# Altium PCB MC.PcbDoc
Units mm, origin at the board's own origin, x right, y up, seen from the top; angles counter-clockwise.
Board outline 74 x 102 mm, 2 copper layers (Top Layer, Bottom Layer); 24 components, 27 nets, 100 pads, 0 vias.
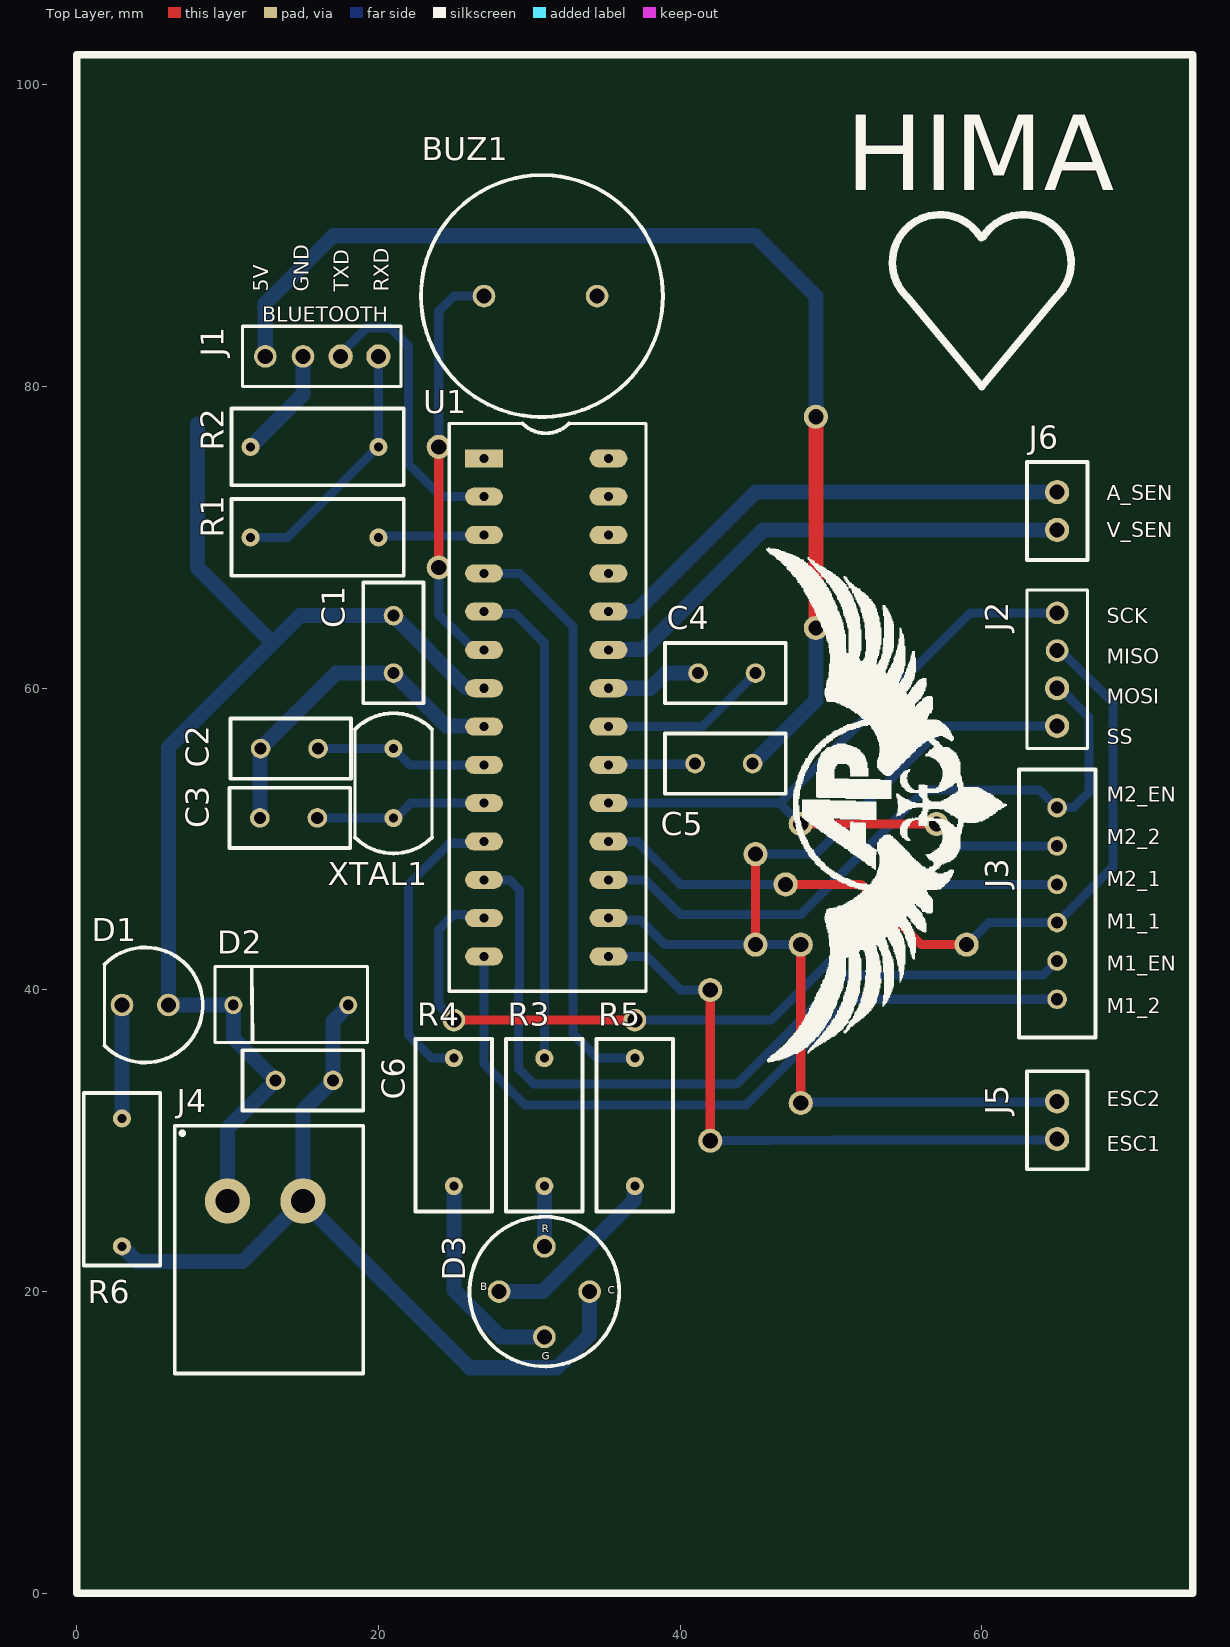
[diagram p0: Top Layer view]
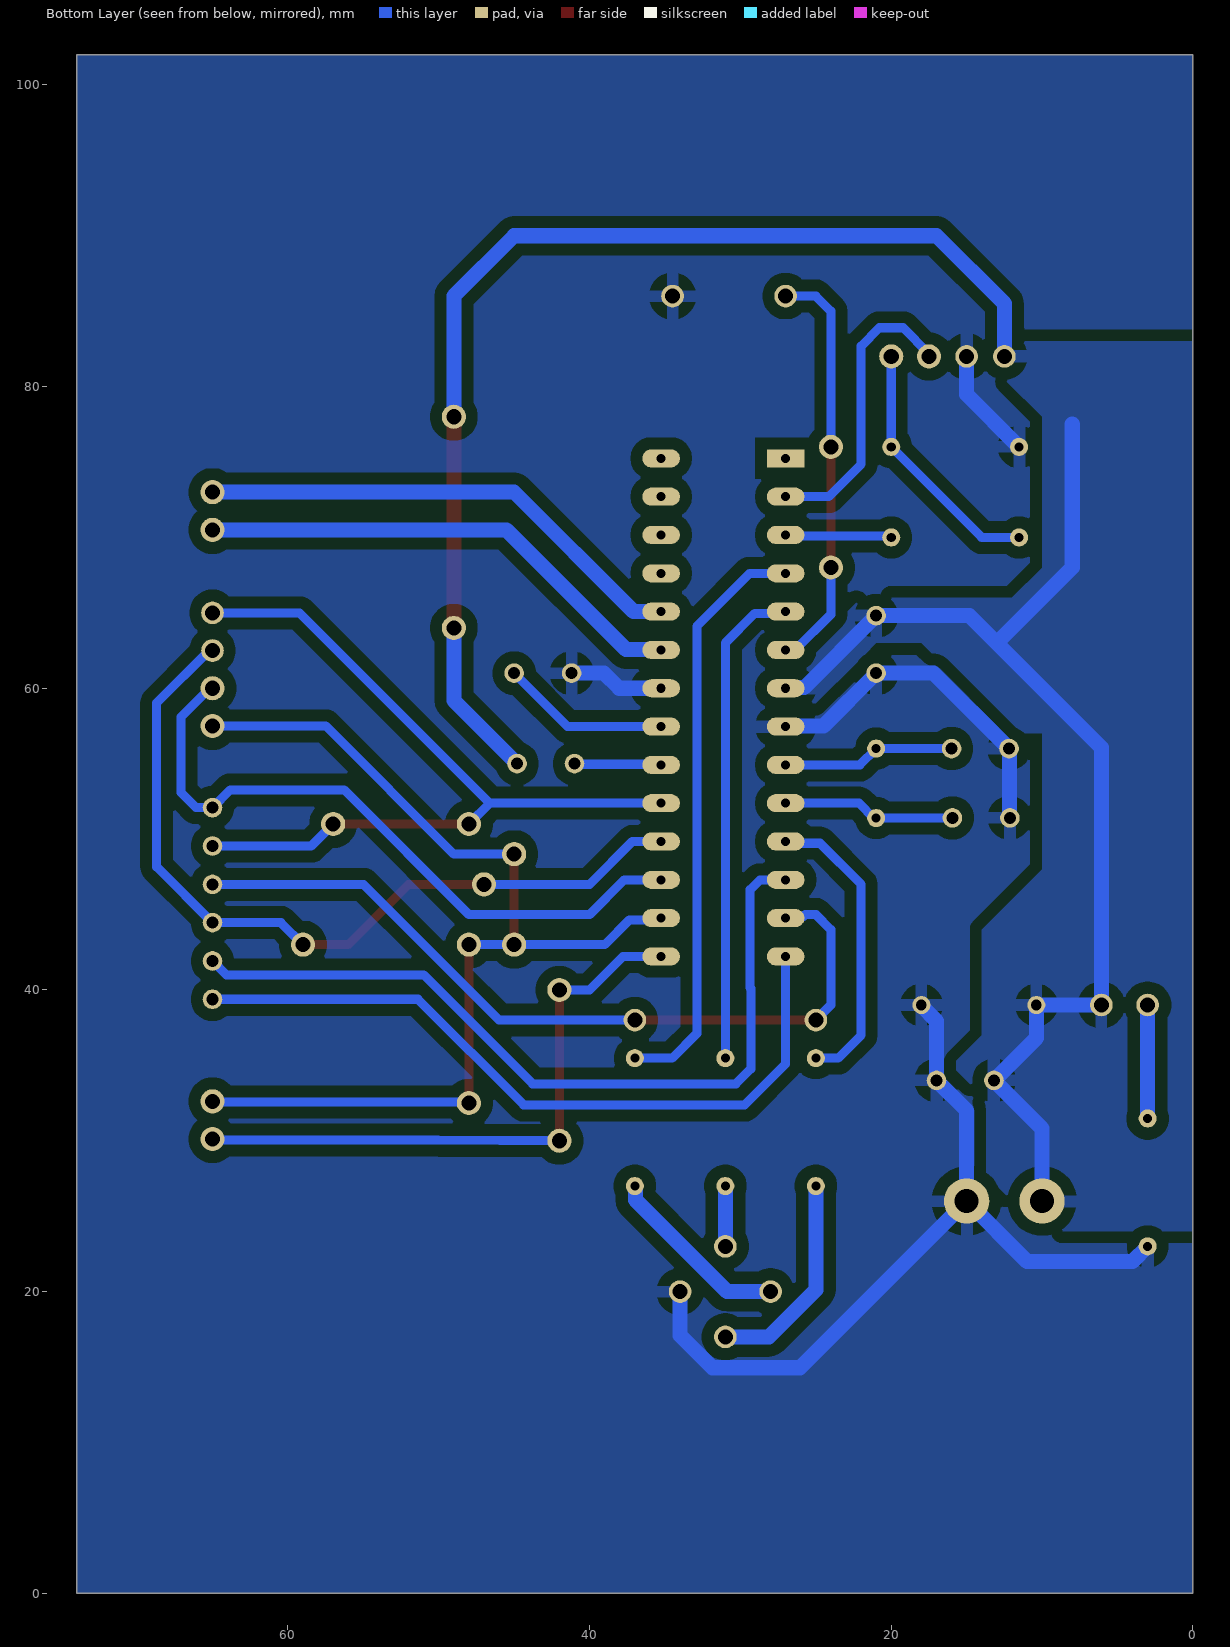
[diagram p1: Bottom Layer view, seen from below]

## Layer stack, top to bottom
Top Solder: solder mask 0.0102, Solder Resist, Dk 3.5
Top Layer: signal copper 0.0356
Dielectric 1: dielectric 0.32, FR-4, Dk 4.8
Bottom Layer: signal copper 0.0356
Bottom Solder: solder mask 0.0102, Solder Resist, Dk 3.5

## Board outline
0,0 74,0 74,102 0,102

## Design rules (kind name [scope] priority, off if disabled: settings)
Clearance [All] p1: gap=0.8 ignorepadtopadclearanceinfootprint=FALSE
PlaneClearance [All] p1: clearance=0.8
PlaneConnect [All] p1: planeconnectstyle=Relief reliefexpansion=0.8 reliefentries=4 reliefconductorwidth=0.8 reliefairgap=0.8
PolygonConnect [All] p1: connectstyle=Relief reliefconductorwidth=0.8 reliefentries=4 polygonreliefangle="90 Angle" airgapwidth=0.8
RoutingVias [All] p1: holewidth=0.711 width=1.27 viastyle="Through Hole" minholewidth=0.711 minwidth=1.27 maxholewidth=0.711 maxwidth=1.27
SolderMaskExpansion [All] p1: expansion=0.102 istentingtop=FALSE
Width [All] p1: maxlimit=1 minlimit=0.6 preferedwidth=0.8 minimp=50.000000 maximp=50.000000 favimp=50.000000
28 further rules are at their usual default settings.

## Components (designator, comment, footprint, x,y, rotation, side; value= is the part's Value field where it differs from the comment)
BUZ1 "BUZZER" Buzzer 27,86 r0 top
C1 "Ceramic Capacitor" "Ceramic Cap" 21,61 r90 top value=100nF
C2 "Ceramic Capacitor" "Ceramic Cap" 12.19,56 r0 top value=22pF
C3 "Ceramic Capacitor" "Ceramic Cap" 12.137,51.405 r0 top value=22pF
C4 "Ceramic Capacitor" "Ceramic Cap" 45,61 r180 top value=100nF
C5 "Ceramic Capacitor" "Ceramic Cap" 41,55 r0 top value=100nF
C6 "Ceramic Capacitor" "Ceramic Cap" 17,34 r180 top value=100nF
D1 "LED" LED5MM 6.072,39 r180 top
D2 "Zener" Zener10 18,39 r180 top value=5V
D3 "RGB" RGB 31,20 r0 top
J1 "Serial (Bluetooth)" Headers-4 20,82 r180 top
J2 "Communication-SPI" Headers-4 65,57.5 r90 top
J3 "Motors Control" "Headers 6-pins" 65,39.38 r90 top
J4 "Input VCC" "Terminal Block 2 Plugable" 10,26 r0 top
J5 "ESC Control" "Headers 2-Pins" 65,32.612 r270 top
J6 "Sensors" "Headers 2-Pins" 65,73 r270 top
R1 "Resistor" resistor 11.524,70 r0 top value=1K
R2 "Resistor" resistor 11.524,76 r0 top value=2K
R3 "Resistor" resistor 31,35.476 r270 top value=330
R4 "Resistor" resistor 25,35.476 r270 top value=330
R5 "Resistor" resistor 37,35.476 r270 top value=330
R6 "Resistor" resistor 3,23 r90 top value=330
U1 "ATmega328p" ATmega328PU 27,75.24 r0 top
XTAL1 "Crystal" Crystal 21,51.392 r90 top

## Footprints (in the part's own frame and the unit in brackets; to place one, negate y for a bottom-side part, rotate by r counter-clockwise, add the part's x,y. Pads: shape width x height; smd on the part's side, far side on the other; paste and mask are expansions set on the pad)
ATmega328PU [mm]
  rect 2.5x1.2 hole 0.6: 1(0,0)
  oval 2.5x1.2 hole 0.6: 2(0,-2.54) 3(0,-5.08) 4(0,-7.62) 5(0,-10.16) 6(0,-12.7) 7(0,-15.24) 8(0,-17.78) 9(0,-20.32) 10(0,-22.86) 11(0,-25.4) 12(0,-27.94) 13(0,-30.48) 14(0,-33.02) 15(8.255,-33.02) 16(8.255,-30.48) 17(8.255,-27.94) 18(8.255,-25.4) 19(8.255,-22.86) 20(8.255,-20.32) 21(8.255,-17.78) 22(8.255,-15.24) 23(8.255,-12.7) 24(8.255,-10.16) 25(8.255,-7.62) 26(8.255,-5.08) 27(8.255,-2.54) 28(8.255,0)
  silkscreen extent -2.3,-35.33 10.75,2.3, body extent -0.77,-34.42 9.23,1.14, height 8.1
Buzzer [mm]
  round 1.5 hole 1: 1(0,0) 2(7.5,0)
  silkscreen extent -4.18,-8.01 11.86,8.01, body extent -2.16,-5.74 9.84,6.26, height 9.51
"Ceramic Cap" [mm]
  round 1.3 hole 0.8: 1(0,0) 2(3.81,0)
  silkscreen extent -2,-2 6,2, body extent -0.83,-1.21 4.83,1.25, height 4
Crystal [mm]
  round 1.2 hole 0.6: 1(0,0) 2(4.608,0)
  silkscreen extent -2.34,-2.56 6.95,2.56, body extent -3.45,-2.45 8.05,2.55, height 4
"Headers 2-Pins" [mm]
  round 1.6 hole 1: 1(0,0) 2(2.5,0)
  silkscreen extent -2,-2 4.5,2, body extent -1.25,-1.25 3.83,1.29, height 9.27
"Headers 6-pins" [mm]
  round 1.3 hole 0.8: 1(0,0) 2(2.54,0) 3(5.08,0) 4(7.62,0) 5(10.16,0) 6(12.7,0)
  silkscreen extent -2.54,-2.54 15.24,2.54, body extent -1.27,-1.27 13.97,1.27, height 8.47
Headers-4 [mm]
  round 1.6 hole 1: 1(0,0) 2(2.5,0)
  round 1.5 hole 1: 3(5,0) 4(7.5,0)
  silkscreen extent -1.5,-2 9,2, body extent -1.25,-1.25 8.83,1.29, height 9.27
LED5MM [mm]
  round 1.5 hole 1: A(0,0) K(3.072,0)
  silkscreen extent -2.28,-3.82 4.23,3.82, body extent -1.01,-2.55 4.09,2.55, height 8.6
resistor [mm]
  round 1.2 hole 0.6: 1(0,0) 2(8.476,0)
  silkscreen extent -1.27,-2.54 10.16,2.54, body extent -0.33,-1.25 8.77,1.25, height 3.25
RGB [mm]
  round 1.5 hole 1: B(-3,0) C(3,0) G(0,-3) R(0,3)
  silkscreen extent -4.96,-4.96 4.96,4.96, body extent -2.55,-2.55 2.55,2.55, height 8.6
"Terminal Block 2 Plugable" [mm]
  round 3 hole 1.6: 1(0,0) 2(5,0)
  silkscreen extent -3.5,-11.43 9,5, body extent -2.46,-10.16 7.54,1.84, height 9.2
Zener10 [mm]
  round 1.2 hole 0.7: 1(0,0) 2(7.62,0)
  silkscreen extent -1.27,-2.54 8.83,2.5, body extent -0.26,-1 7.86,1, height 2

## Part data
J1 J2: library part Headers-4
J3: library part Headers-6
J4: library part "Terminal Block 2-pins", MF="Phoenix Contact", PN=1935161, Supplier=Digikey, Supplier PN=277-1667-ND
J5 J6: library part Header-2
U1: ComponentLink1Description=link, ComponentLink1URL=https://electra.store/product/atmega328pu/, MF=ATmel, PN=ATmega328PU, Supplier=Electra

## Free pads (board coordinates)
  round 1.5 hole 1: 2(25,38) 3(37,38)
  round 1.6 hole 1: 4(47,47) 5(59,43) 6(45,49) 8(45,43) 9(42,40) 10(42,30) 11(48,43) 13(48,32.5) 14(48,51) 16(57,51) 17(24,76) 18(24,68) 19(49,64) 20(49,78)

## Nets (pads, with @x,y where several pads share a name; then routed paths per layer and width w, separated by ;. In a path a pad name is that pad's centre, name@x,y a point inside that pad or via, vN(x,y) a via of type N, cw(c..) or ccw(c..) an arc to the next point about the centre after c; other vN are vias at no path point)
+5V0: C1.2 C5.2 C6.2 D1.A D2.2 J1.4 J4.1 pad.19 pad.20 U1.7 | length 156.4
  Top Layer w1: pad.19 49,77.611 48.747,77.865 pad.20
  Bottom Layer w1: 8,77.5 8,68 13,63 ; J4.1 10,30.81 C6.2 10.38,36.81 D2.2 D1.A 6.072,56.072 13,63 ; J1.4 12.5,85.5 17,90 45,90 49,86 pad.20 ; C1.2 14.81,64.81 13,63 ; C1.2@21.057,64.753 25.772,60.038 26.962,60.038 U1.7 ; C5.2 49,59.19 pad.19
A_sen: J6.1 U1.24 | length 32.7
  Bottom Layer w1: U1.24 37.08,65.08 45,73 J6.1@64.723,73
Blue: R5.1 U1.4 | length 39.3
  Bottom Layer w0.6: U1.4 29.38,67.62 32.888,64.112 32.888,37.112 34.524,35.476 R5.1 R5.1@36.885,35.59
BUZZER: BUZ1.1 pad.17 pad.18 U1.6 | length 27.5
  Top Layer w0.6: pad.18 pad.17
  Bottom Layer w0.6: pad.18 24,64.89 26.35,62.54 U1.6 ; pad.17 24,85 25,86 BUZ1.1
ESC1: J5.2 pad.9 pad.10 U1.15 | length 40.7
  Top Layer w0.6: pad.10 pad.9
  Bottom Layer w0.6: U1.15 37.78,42.22 40,40 pad.9 ; pad.10 50.056,30.056 64.944,30.056 J5.2
GND: BUZ1.2 C1.1 C2.1 C3.1 C4.2 C6.1 D2.1 D3.C J1.3 J4.2 R2.1 R6.1 U1.8 U1.22 | length 93.1
  Bottom Layer w1: R6.1 4,22 11,22 J4.2 ; R2.1 15,79.476 J1.3 ; C3.1 12.163,51.431 12.163,55.973 C2.1 17.19,61 C1.1 24.502,57.498 26.962,57.498 U1.8 U1.8@26.296,57.46 ; D2.1 18,38.946 17,37.946 C6.1 15,32 J4.2 ; D3.C 34,17.101 31.849,14.95 26.05,14.95 J4.2 ; U1.22 38.034,60 39.034,61 C4.2
Green: R4.1 U1.11 | length 19.8
  Bottom Layer w0.6: R4.1 23.524,35.476 22,37 22,47 24.725,49.725 26.885,49.725 U1.11
MISO_Motor1_1: J2.3 J3.3 pad.4 pad.5 U1.18 | length 54.4
  Top Layer w0.6: pad.4 52,47 56,43 pad.5
  Bottom Layer w0.6: U1.18 37.16,49.84 40,47 pad.4 ; pad.5 60.46,44.46 J3.3 68.7,48.16 68.7,59.033 65.233,62.5 J2.3
MOSI_Motor2_EN: J2.2 J3.6 U1.17 | length 45.1
  Bottom Layer w0.6: U1.17 37.7,47.3 40,45 48,45 56.267,53.267 63.813,53.267 J3.6 66.08,52.08 67.1,53.1 67.1,58.087 J2.2@65.02,60.167
Motor1_2: J3.1 U1.14 | length 49.2
  Bottom Layer w0.6: U1.14 27,35.091 29.716,32.376 44.376,32.376 51.38,39.38 J3.1
Motor1_EN: J3.2 U1.12 | length 54
  Bottom Layer w0.6: U1.12 28.7,47.3 29.35,46.65 29.35,40.143 29.3,40.093 29.3,34.771 30.296,33.776 43.776,33.776 51,41 64.08,41 J3.2
Motor2_1: J3.4 pad.2 pad.3 U1.13 | length 53.7
  Top Layer w0.6: pad.2 pad.3
  Bottom Layer w0.6: pad.2 24,39 24,44 25,45 25.699,45 25.824,44.875 26.885,44.875 U1.13 ; pad.3 46,38 55,47 J3.4
NetC2_2: C2.2 U1.9 XTAL1.2 | length 11.5
  Bottom Layer w0.6: C2.2@16.002,55.998 C2.2 XTAL1.2 22.08,54.92 U1.9
NetC3_2: C3.2 U1.10 XTAL1.1 | length 11.5
  Bottom Layer w0.6: C3.2 15.953,51.398 20.994,51.398 XTAL1.1 21.145,51.392 22.133,52.38 U1.10
NetC4_1: C4.1 U1.21 | length 11.2
  Bottom Layer w0.6: U1.21 41.46,57.46 C4.1
NetC5_1: C5.1 U1.20 | length 5.9
  Bottom Layer w0.6: U1.20@35.31,54.865 U1.20 35.295,54.96 40.96,54.96 C5.1
NetD1_K: D1.K R6.2 | length 7.5
  Bottom Layer w1: R6.2 D1.K
NetD3_B: D3.B R5.2 | length 12.4
  Bottom Layer w1: D3.B 30.899,20 36.962,26.063 36.962,26.962 R5.2
NetD3_G: D3.G R4.2 | length 14.2
  Bottom Layer w1: R4.2 25,20.101 28.101,17 D3.G
NetD3_R: D3.R R3.2 | length 4
  Bottom Layer w1: D3.R R3.2
NetJ1_1: J1.1 R1.1 R2.2 | length 17
  Bottom Layer w0.6: R1.1 14,70 R2.2 J1.1
Red: R3.1 U1.5 | length 32.4
  Bottom Layer w0.6: U1.5 27.115,64.965 29.035,64.965 31,63 R3.1
RXD: J1.2 U1.2 | length 19.6
  Bottom Layer w0.6: J1.2 17.5,82.187 19.213,83.9 20.787,83.9 22,82.687 22,74.853 24.153,72.7 U1.2
SCK_Motor2_2: J2.4 J3.5 pad.14 pad.16 U1.19 | length 54.5
  Top Layer w0.6: pad.14 pad.16
  Bottom Layer w0.6: U1.19 46.62,52.38 ; pad.14 46.62,52.38 ; pad.16 58.46,49.54 J3.5 ; J2.4 59.24,65 46.62,52.38
SS_ESC2: J2.1 J5.1 pad.6 pad.8 pad.11 pad.13 U1.16 | length 70.5
  Top Layer w0.6: pad.8 pad.6 ; pad.13 pad.11
  Bottom Layer w0.6: U1.16 35.37,44.645 37.355,44.645 39,43 pad.8 pad.11 ; pad.6 49,49 57.5,57.5 J2.1 ; pad.13 48.056,32.556 64.944,32.556 J5.1
TXD: R1.2 U1.3 | length 7.1
  Bottom Layer w0.6: R1.2 20.08,70.08 26.92,70.08 U1.3
V_sen: J6.2 U1.23 | length 33
  Bottom Layer w1: U1.23 35.293,62.578 37.578,62.578 45.5,70.5 J6.2
pads on no net: U1.1 U1.25 U1.26 U1.27 U1.28

## Polygon pours and split planes (outlines as drawn)
GND on Bottom Layer "NONET_L01_P-001" (solid, pour order 1): 74,102 0,102 0,0 74,0
+5V0 on Bottom Layer "NONET_L01_P-001" (solid, pour order 0): 0,24 11,24 11,25 14,28 14,33 16,35 14,37 14,44 10,48 10,57 12,57 18,63 21,63 25,59 29,59 29,61 26,61 26,62 22,66 12,66 10,68 10,78 14,82 13,83 0,83

## Silkscreen, mask and mechanical layers (free items; w line width, h text height)
Top Overlay:
  drawing of 10 lines, arcs and shapes, not listed
  text "HIMA" at 51,93 h5
  text "5V" at 12.7,86.3 h1 r90
  text "GND" at 15.367,86.3 h1 r90
  text "TXD" at 18.033,86.3 h1 r90
  text "RXD" at 20.7,86.3 h1 r90
  text "BLUETOOTH" at 12.3,84.3 h1
  text "A_SEN" at 68.3,72.467 h1
  text "V_SEN" at 68.285,70.022 h1
  text "SCK" at 68.3,64.3 h1
  text "MISO" at 68.3,61.633 h1
  text "MOSI" at 68.3,58.967 h1
  text "SS" at 68.3,56.3 h1
  text "M2_EN" at 68.3,52.467 h1
  text "M2_2" at 68.3,49.667 h1
  text "M2_1" at 68.3,46.867 h1
  text "M1_1" at 68.3,44.067 h1
  text "M1_EN" at 68.3,41.267 h1
  text "M1_2" at 68.3,38.467 h1
  text "ESC2" at 68.3,32.3 h1
  text "ESC1" at 68.3,29.3 h1

## Text inside footprints (layer, text, board x,y; h text height)
D3: Top Overlay "G" at 30.844,15.492 h0.5; Top Overlay "B" at 26.748,20.1 h0.5; Top Overlay "R" at 30.844,23.94 h0.5; Top Overlay "C" at 35.196,19.844 h0.5